# EAGLE board OUTPUT DEVICE (EAGLE 7.2.0)
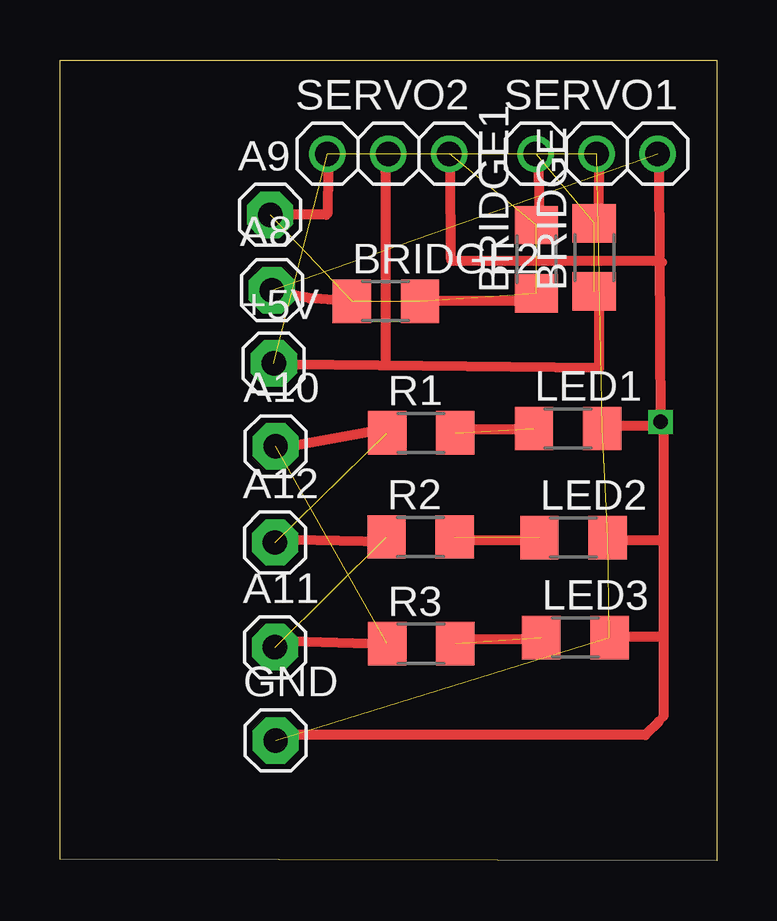
[diagram p0: board, top side]

Size 27.38 x 33.38 mm. Coordinates in mm from the lower left corner, seen from the top.
Outline: 0,33.38 27.38,33.38 27.38,0 0,0.05 0,33.38
Copper layers (1*16): Top 0.035mm / dielectric 1.5mm / Bottom 0.035mm
Design rules "default *": minimum track width 10mil, minimum drill 24mil, track to track 16mil, track to pad 16mil, pad to pad 16mil, via to via 16mil, smd to smd 16mil, copper to edge 16mil, drill to drill 8mil, minimum pad ring 10mil, minimum via ring 8mil, stop-mask expansion 4mil, vias tented up to drill 0mil, thermal gap 10mil

## Footprints (pad centres in the part's own frame; a part is rotated, then mirrored left to right if it is on the bottom)
1X01 = drill 1.016 pad 1.93 octagon: 1 0,0
1206 = smd 1.6 x 1.803: 1 -1.422,0; 2 1.422,0
1X03 = drill 1.016: 1 -2.54,0; 2 0,0; 3 2.54,0

## Placement (x,y rotation side)
+5V  [1X01]  8.92,20.73 0 top
A8  [1X01]  8.84,23.77 0 top
A9  [1X01]  8.76,26.92 0 top
A10  [1X01]  8.99,17.27 0 top
A11  [1X01]  8.97,8.89 0 top
A12  [1X01]  8.97,13.26 0 top
BRIDGE  0 OHM  [1206]  22.28,25.15 90 top
BRIDGE1  0 OHM  [1206]  19.86,25.07 90 top
BRIDGE2  0 OHM  [1206]  13.59,23.32 0 top
GND  [1X01]  8.99,5 0 top
LED1  499  [1206]  21.18,18.01 0 top
LED2  499  [1206]  21.41,13.46 0 top
LED3  499  [1206]  21.49,9.3 0 top
R1  499  [1206]  15.06,17.83 0 top
R2  499  [1206]  15.04,13.49 0 top
R3  499  [1206]  15.06,9.04 0 top
SERVO1  [1X03]  22.38,29.46 0 top
SERVO2  [1X03]  13.69,29.46 0 top

## Library data of the parts
+5V A8-A12 GND SERVO1 SERVO2 = 01_adafruit
BRIDGE BRIDGE1 BRIDGE2 LED1-LED3 R1-R3 = ng

## Nets
N$12: GND.1 LED1.2 LED2.2 LED3.2 SERVO1.2 SERVO2.2
N$13: LED1.1 R1.2
N$14: A12.1 R1.1
N$15: LED3.1 R3.2
N$16: LED2.1 R2.2
N$17: A11.1 R2.1
N$18: A10.1 R3.1
N$19: +5V.1 BRIDGE.1 BRIDGE.2 SERVO1.1 SERVO2.1
N$21: A9.1 BRIDGE1.1 BRIDGE1.2 BRIDGE2.1 BRIDGE2.2 SERVO2.3
N$22: A8.1 SERVO1.3

## Tracks (layer width: path | path; a pad name or v marks a point on that pad's centre or on a via)
N$1
  Top 0.406: 24.99,18.19 25.15,18.03 25.15,5.99
N$2
  Top 0.406: 9.73,13.51 9.68,13.39 13.64,13.31
N$3
  Top 0.406: 16.26,13.41 16.31,13.36 19.94,13.36
N$4
  Top 0.406: 22.86,13.36 24.94,13.36
N$5
  Top 0.406: 9.75,17.37 9.73,17.3 13.74,18.03
N$6
  Top 0.406: 16.46,18.03 16.51,17.98 19.99,17.98
N$7
  Top 0.406: 25.04,9.32 22.71,9.32 22.66,9.27
N$8
  Top 0.406: 20.02,9.22 16.48,9.22 16.43,9.27
N$9
  Top 0.406: 13.59,9.02 9.55,9.14 9.6,9.22
N$10
  Top 0.406: 24.97,5.79 24.41,5.23 9.65,5.23
N$11
  Top 0.406: 22.5,18.03 22.61,18.14 24.89,18.14
N$12  (5 unrouted)
N$13  (1 unrouted)
N$14  (1 unrouted)
N$15  (1 unrouted)
N$16  (1 unrouted)
N$17  (1 unrouted)
N$18  (1 unrouted)
N$19  (4 unrouted)
N$20  (via drill 0.6)
  Top 0.406: v25.04,18.29 24.99,28.78
N$21  (5 unrouted)
N$22  (1 unrouted)
N$23
  Top 0.406: 25.04,24.99 25.09,24.94
N$24
  Top 0.406: 22.48,28.73 22.43,26.49 22.23,26.29
N$25
  Top 0.406: 22.48,23.62 22.48,20.52 9.6,20.68
N$26
  Top 0.406: 13.56,28.7 13.56,20.7 13.69,20.68
N$27
  Top 0.406: 19.94,28.8 19.99,26.49 19.86,26.36
N$28
  Top 0.406: 15.14,23.34 19.58,23.34 19.86,23.62
N$29
  Top 0.406: 11.91,23.32 10.39,23.44 9.6,23.6
N$30
  Top 0.406: 11.18,28.85 11.15,26.95
N$31
  Top 0.406: 16.26,28.8 16.28,25.09 16.33,25.04
N$32
  Top 0.406: 11.1,26.92 9.53,26.92 9.42,26.82
N$33
  Top 0.406: 16.31,25.02 24.99,25.02 25.02,25.04